# Altium PCB CAN_GPIO_1.0_RW.PcbDoc
Units mil, origin at the board's own origin, x right, y up, seen from the top; angles counter-clockwise.
Board outline 2000 x 3000 mil, 4 copper layers (Top Layer, Vcc, GND, Bottom Layer), stack 23.756 mil thick; 141 components, 72 nets, 323 pads, 43 vias.
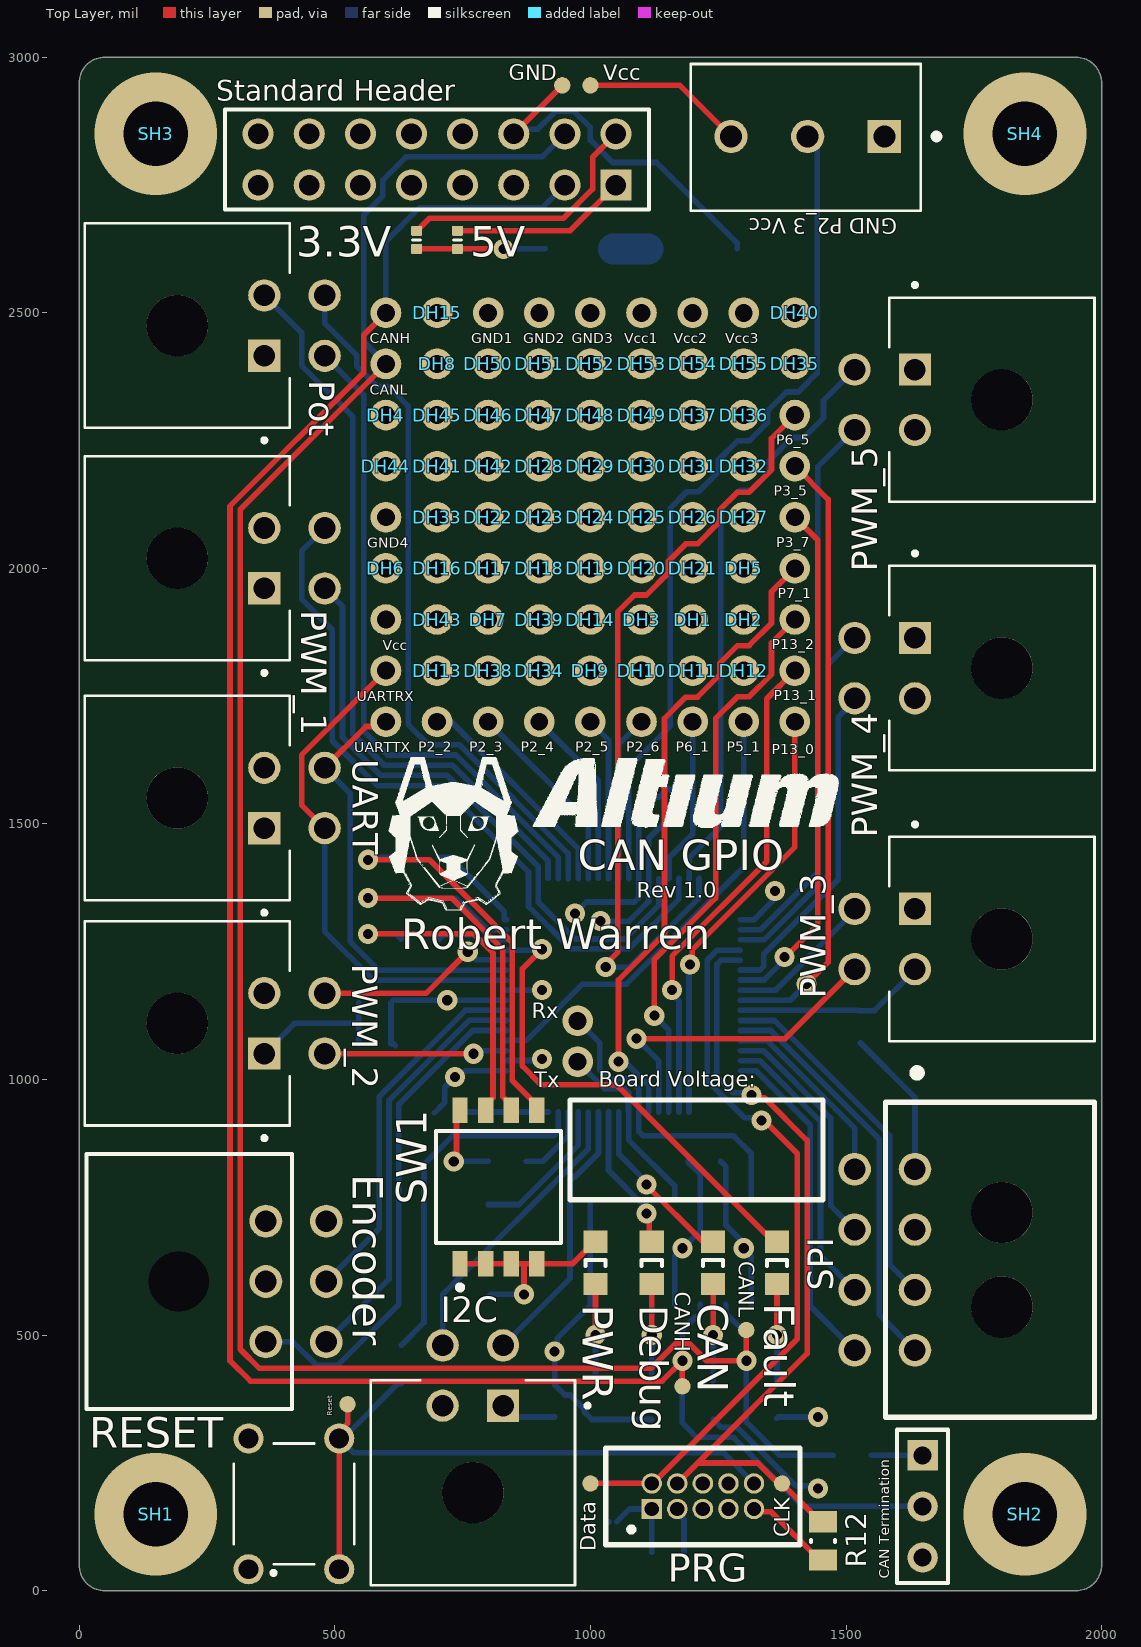
[diagram p0: Top Layer view]
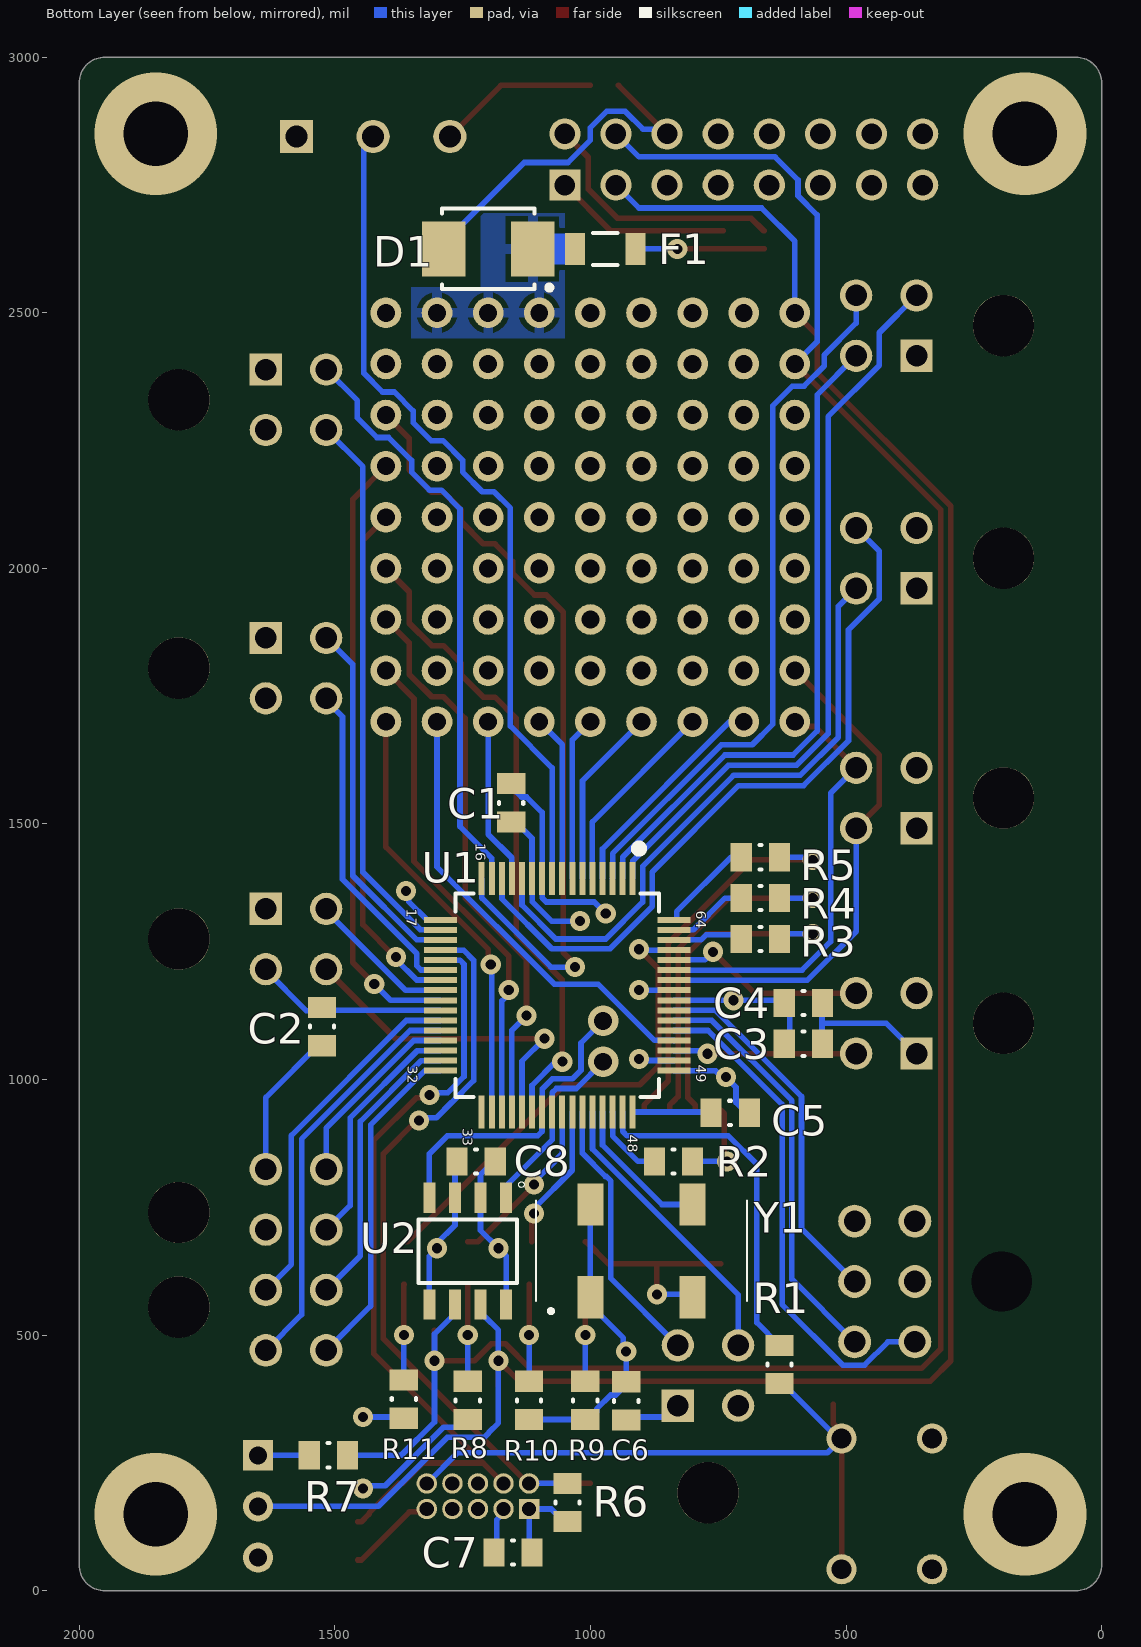
[diagram p1: Bottom Layer view, seen from below]
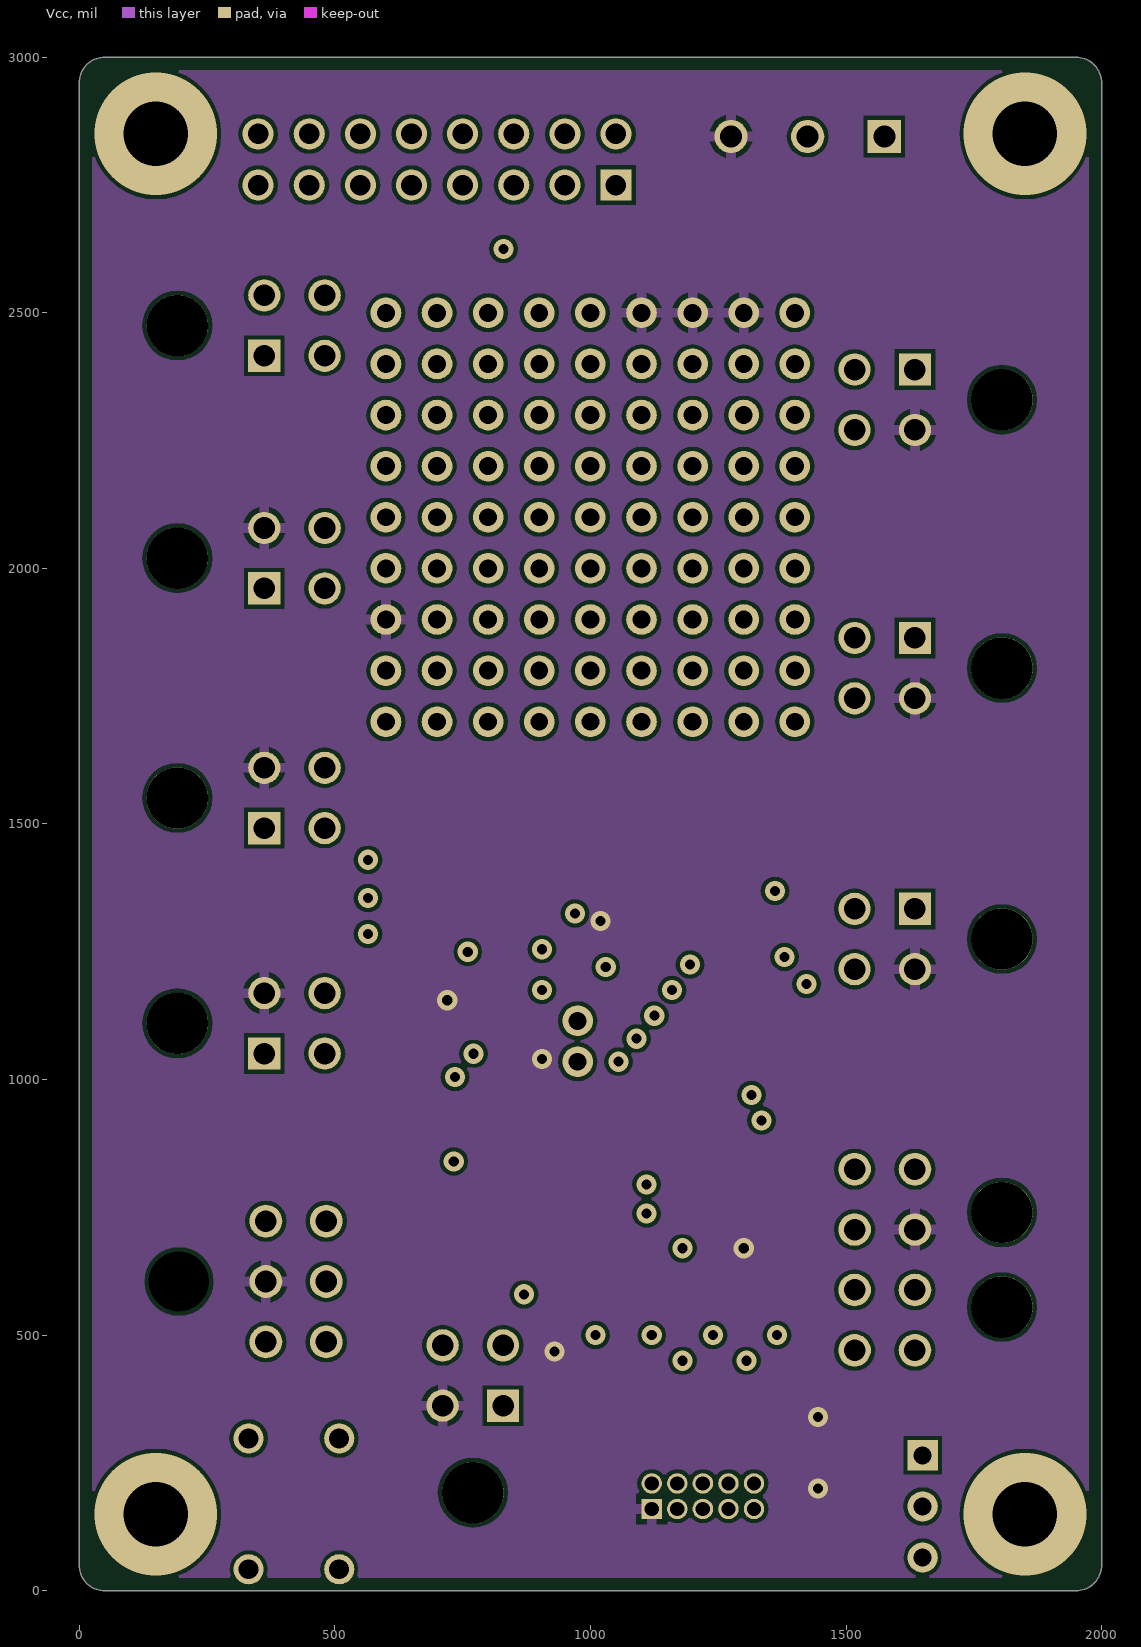
[diagram p2: Vcc]
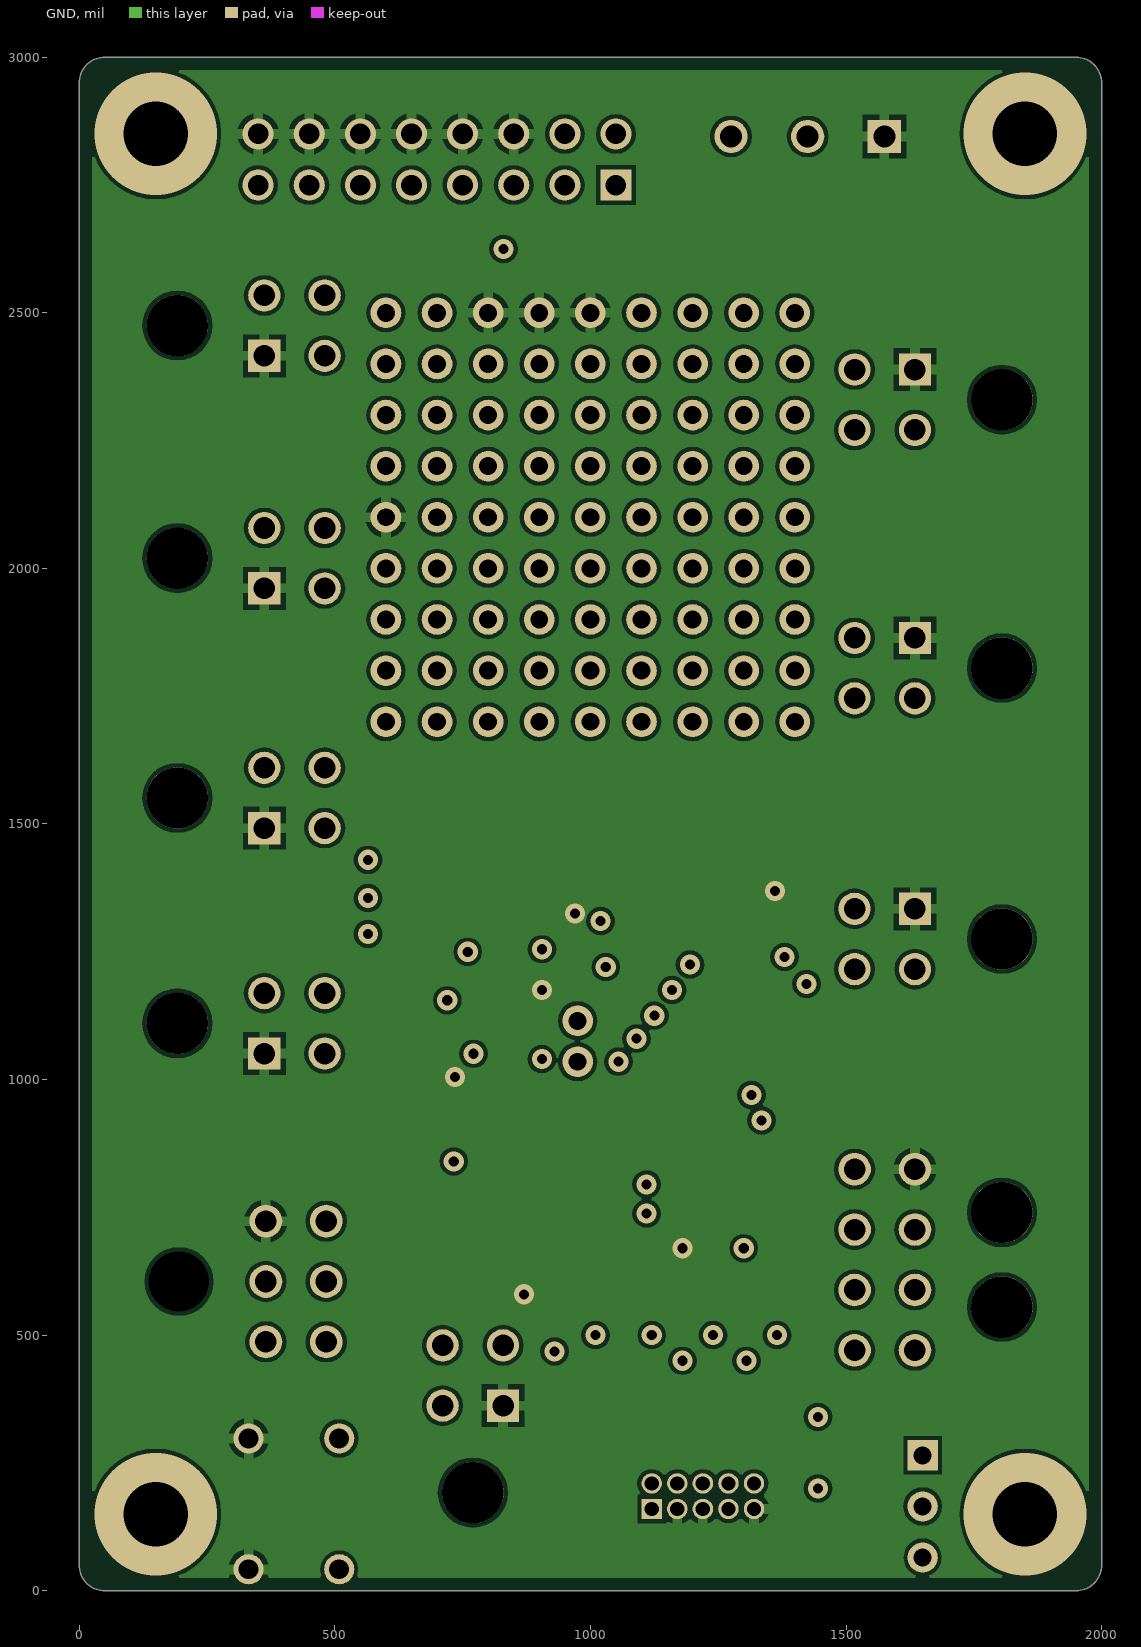
[diagram p3: GND]
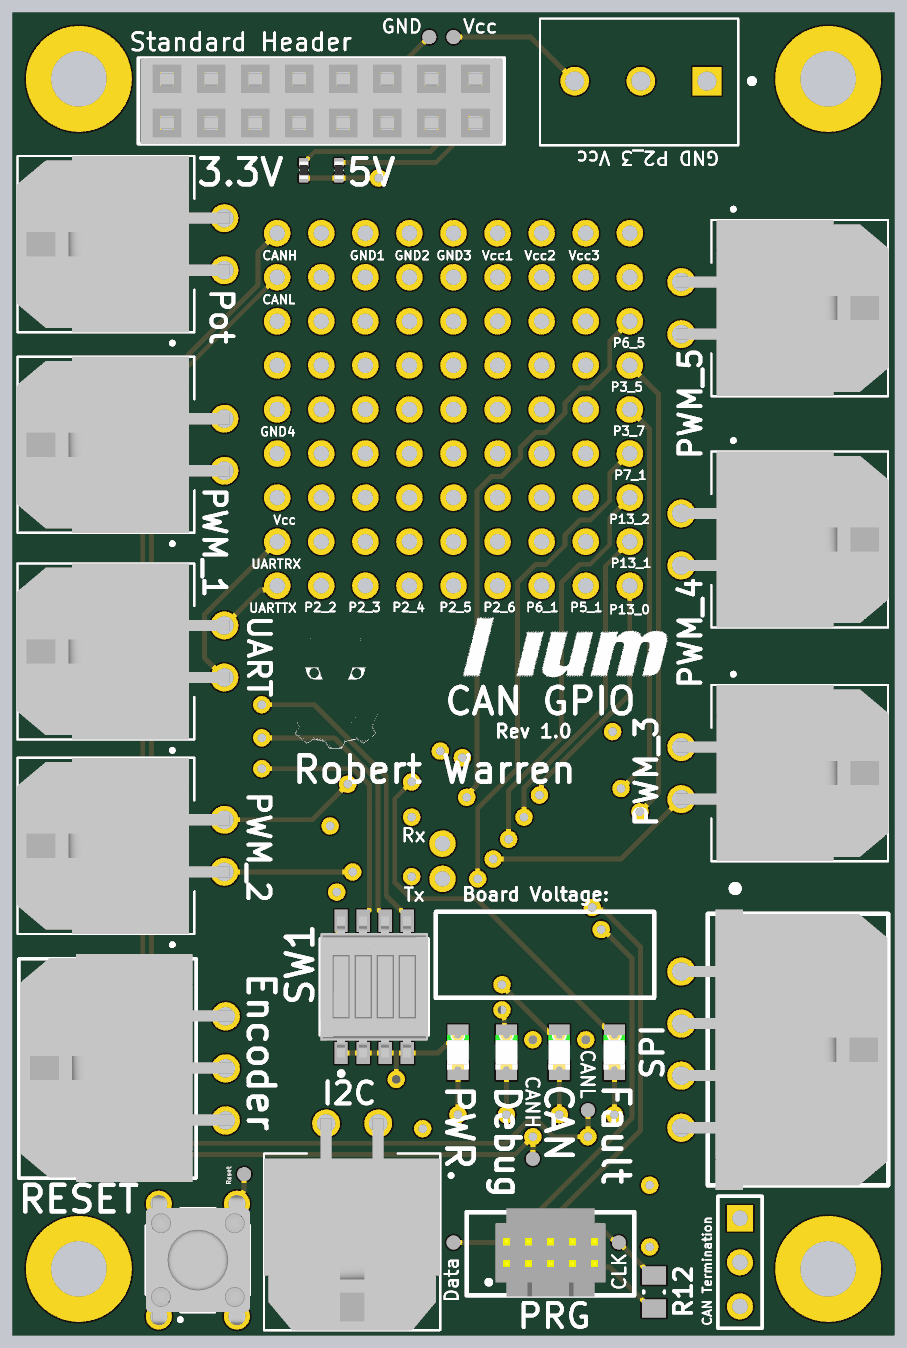
[diagram p4: 3D render of the assembled board from above, using the file's embedded part models]

## Layer stack, top to bottom
Top Solder: solder mask 0.4, Solder Resist, Dk 3.5
Top Layer: signal copper 1.4
Dielectric 2: prepreg 2.8, PP-006, Dk 4.1
Vcc: signal copper 1.378
Dielectric 1: dielectric 12.6, FR-4, Dk 4.8
GND: signal copper 1.378
Dielectric 3: prepreg 2.8, PP-006, Dk 4.1
Bottom Layer: signal copper 1.4
Bottom Solder: solder mask 0.4, Solder Resist, Dk 3.5

## Board outline
50,0 1950,0 ccw(c1950,50) 2000,50 2000,2950 ccw(c1950,2950) 1950,3000 50,3000 ccw(c50,2950) 0,2950 0,50 ccw(c50,50)

## Design rules (kind name [scope] priority, off if disabled: settings)
BoardOutlineClearance [All] p1: gap=7.87 ignorepadtopadclearanceinfootprint=FALSE except(15.75: Arc-SplitBarrior Arc-SplitContinuation Track-SplitBarrior Track-SplitContinuation SMDPad-SplitBarrior SMDPad-SplitContinuation THPad-SplitBarrior THPad-SplitContinuation Via-SplitBarrior Via-SplitContinuation Fill-SplitBarrior Fill-SplitContinuation Poly-SplitBarrior Poly-SplitContinuation Region-SplitBarrior Region-SplitContinuation Text-SplitBarrior Text-SplitContinuation)
Clearance "Clearance Bottom Layer" [OnLayer('Bottom Layer')] p1: gap=8 ignorepadtopadclearanceinfootprint=TRUE except(10: Arc-Text Track-Text SMDPad-Text THPad-Text Via-Text Fill-Text Poly-Text Region-Text Text-Text)
Clearance "Clearance Top Layer" [OnLayer('Top Layer')] p2: gap=8 ignorepadtopadclearanceinfootprint=TRUE except(10: Arc-Text Track-Text SMDPad-Text THPad-Text Via-Text Fill-Text Poly-Text Region-Text Text-Text)
Clearance [All] p3: gap=7.87 ignorepadtopadclearanceinfootprint=FALSE except(3.5: Arc-Arc Arc-Track Arc-SMDPad Track-Track Track-SMDPad SMDPad-SMDPad; 5: Arc-Via Track-Via SMDPad-Via THPad-Via Via-Via; 10: Arc-Text Track-Text SMDPad-Text THPad-Text Via-Text Fill-Text Poly-Text Region-Text Text-Text)
HoleSize [All] p1: absolutevalues=TRUE maxlimit=248.03 minlimit=7.87 maxpercent=80.000 minpercent=20.000
MinimumAnnularRing [All] p1: minimumring=3
MinimumSolderMaskSliver [All] p1: minsoldermaskwidth=3.94
PolygonConnect PolygonConnect_1 [All] p1: thpad.connectstyle=Relief thpad.reliefconductorwidth=20 thpad.reliefentries=4 thpad.polygonreliefangle="90 Angle" thpad.airgapwidth=10 smdpad.connectstyle=Relief smdpad.reliefconductorwidth=20 smdpad.reliefentries=4 smdpad.polygonreliefangle="90 Angle" smdpad.airgapwidth=10 via.connectstyle=Direct via.reliefconductorwidth=20 via.reliefentries=4 via.polygonreliefangle="90 Angle" via.airgapwidth=10
RoutingCorners [All] p1: cornerstyle=Round minsetback=100 maxsetback=100
RoutingVias [All] p1: holewidth=19.68 width=39.37 viastyle="Through Hole" minholewidth=7.87 minwidth=17.72 maxholewidth=39.37 maxwidth=78.74
SilkToSilkClearance [All] p1: silktosilkclearance=3.94
SilkToSolderMaskClearance [IsPad] p1: minsilkscreentomaskgap=3.94 clearancetoexposedcopper=TRUE
SolderMaskExpansion [All] p1: expansion=4 istentingtop=FALSE
Width [All] p1: maxlimit=100 minlimit=3.5 preferedwidth=15
25 further rules are at their usual default settings.

## Classes and differential pairs
component class LEDs: CAN Debug Fault PWR R8 R9 R10 R11
component class PSoC: 11 C1 C2 C3 C4 C5 C6 GND R1 R2 R3 R4 R5 RESET "Reset " SH1 SH2 SH3 SH4 SW1 U1 "Vcc  " Y1
component class Connectors: 3.3V 5V 20 C7 "CANH " "CANL " CLK D1 Data DH1 DH2 DH3 DH4 DH5 DH6 DH7 DH8 DH9 DH10 DH11 DH12 DH13 DH14 DH15 DH16 DH17 DH18 DH19 DH20 DH21 DH22 DH23 DH24 DH25 DH26 DH27 DH28 DH29 DH30 DH31 DH32 DH33 DH34 DH35 DH36 DH37 DH38 DH39 DH40 DH41 DH42 DH43 DH44 DH45 DH46 DH47 DH48 DH49 DH50 DH51 DH52 DH53 DH54 DH55 Encoder F1 GND1 GND2 GND3 GND4 "GND P2_3 Vcc" I2C P2_2 P2_3 P2_4 P2_5 P2_6 P3_5 P3_7 P5_1 P6_1 P6_5 P7_1 P13_0 P13_1 P13_2 Pot PRG PWM_1 PWM_2 PWM_3 PWM_4 PWM_5 R6 R12 SPI "Standard Header" UART UARTRX UARTTX Vcc Vcc1 Vcc2 Vcc3
component class CAN: C8 "CAN Termination" CANH CANL R7 Rx Tx U2

## Components (designator, comment, footprint, x,y, rotation, side; value= is the part's Value field where it differs from the comment)
3.3V "JUMPER" RESC0402(1005)_L 660,2642.72 r270 top value=0
5V "JUMPER" RESC0402(1005)_L 740,2642.72 r270 top value=0
C1 "10 μF" "Cap 0805" 1155,1541.5 r270 bottom
C2 "10 μF" "Cap 0805" 1525,1103.5 r270 bottom
C3 "0.1 μF" "Cap 0805" 583.5,1070 r0 bottom
C4 "0.1 μF" "Cap 0805" 583.5,1150 r180 bottom
C5 "1 μF" "Cap 0805" 726.5,935 r0 bottom
C6 "0.1 μF" "Cap 0805" 930,371.5 r90 bottom
C7 "0.1 μF" "Cap 0805" 1151.5,75 r180 bottom
C8 "0.1 μF" "Cap 0805" 1223.5,840 r180 bottom
CAN "LED" 0805_A 1240,641.34 r270 top
"CAN Termination" "Header 3" HDR1X3 1650,265 r270 top
CANH "Test Point" "Test Point Through-hole" 625,2480 r90 top
CANH "Test Point" "Test Point pad" 1200,415 r180 top
CANL "Test Point" "Test Point Through-hole" 625,2380 r90 top
CANL "Test Point" "Test Point pad" 1325,525 r180 top
CLK "Test Point" "Test Point pad" 1355,195 r0 top
D1 "1SMB5917BT3G" ONSC-SMB-2-403A-03_H_V 1200,2625 r0 bottom
Data "Test Point" "Test Point pad" 980,195 r0 top
Debug "LED" 0805_A 1120,641.34 r270 top
DH1 "Test Point" "Test Point Through-hole" 1180,1875 r0 top
DH2 "Test Point" "Test Point Through-hole" 1325,1880 r90 top
DH3 "Test Point" "Test Point Through-hole" 1125,1880 r90 top
DH4 "Test Point" "Test Point Through-hole" 625,2280 r90 top
DH5 "Test Point" "Test Point Through-hole" 1325,1980 r90 top
DH6 "Test Point" "Test Point Through-hole" 620,2025 r180 top
DH7 "Test Point" "Test Point Through-hole" 820,1925 r180 top
DH8 "Test Point" "Test Point Through-hole" 725,2380 r90 top
DH9 "Test Point" "Test Point Through-hole" 1025,1780 r90 top
DH10 "Test Point" "Test Point Through-hole" 1125,1780 r90 top
DH11 "Test Point" "Test Point Through-hole" 1225,1780 r90 top
DH12 "Test Point" "Test Point Through-hole" 1325,1780 r90 top
DH13 "Test Point" "Test Point Through-hole" 725,1780 r90 top
DH14 "Test Point" "Test Point Through-hole" 1025,1880 r90 top
DH15 "Test Point" "Test Point Through-hole" 680,2475 r0 top
DH16 "Test Point" "Test Point Through-hole" 725,1980 r90 top
DH17 "Test Point" "Test Point Through-hole" 825,1980 r90 top
DH18 "Test Point" "Test Point Through-hole" 925,1980 r90 top
DH19 "Test Point" "Test Point Through-hole" 1025,1980 r90 top
DH20 "Test Point" "Test Point Through-hole" 1125,1980 r90 top
DH21 "Test Point" "Test Point Through-hole" 1225,1980 r90 top
DH22 "Test Point" "Test Point Through-hole" 825,2080 r90 top
DH23 "Test Point" "Test Point Through-hole" 925,2080 r90 top
DH24 "Test Point" "Test Point Through-hole" 1025,2080 r90 top
DH25 "Test Point" "Test Point Through-hole" 1125,2080 r90 top
DH26 "Test Point" "Test Point Through-hole" 1225,2080 r90 top
DH27 "Test Point" "Test Point Through-hole" 1325,2080 r90 top
DH28 "Test Point" "Test Point Through-hole" 925,2180 r90 top
DH29 "Test Point" "Test Point Through-hole" 1025,2180 r90 top
DH30 "Test Point" "Test Point Through-hole" 1125,2180 r90 top
DH31 "Test Point" "Test Point Through-hole" 1225,2180 r90 top
DH32 "Test Point" "Test Point Through-hole" 1325,2180 r90 top
DH33 "Test Point" "Test Point Through-hole" 725,2080 r90 top
DH34 "Test Point" "Test Point Through-hole" 925,1780 r90 top
DH35 "Test Point" "Test Point Through-hole" 1425,2380 r90 top
DH36 "Test Point" "Test Point Through-hole" 1325,2280 r90 top
DH37 "Test Point" "Test Point Through-hole" 1225,2280 r90 top
DH38 "Test Point" "Test Point Through-hole" 825,1780 r90 top
DH39 "Test Point" "Test Point Through-hole" 925,1880 r90 top
DH40 "Test Point" "Test Point Through-hole" 1425,2480 r90 top
DH41 "Test Point" "Test Point Through-hole" 725,2180 r90 top
DH42 "Test Point" "Test Point Through-hole" 825,2180 r90 top
DH43 "Test Point" "Test Point Through-hole" 725,1880 r90 top
DH44 "Test Point" "Test Point Through-hole" 625,2180 r90 top
DH45 "Test Point" "Test Point Through-hole" 725,2280 r90 top
DH46 "Test Point" "Test Point Through-hole" 825,2280 r90 top
DH47 "Test Point" "Test Point Through-hole" 925,2280 r90 top
DH48 "Test Point" "Test Point Through-hole" 1025,2280 r90 top
DH49 "Test Point" "Test Point Through-hole" 1125,2280 r90 top
DH50 "Test Point" "Test Point Through-hole" 825,2380 r90 top
DH51 "Test Point" "Test Point Through-hole" 925,2380 r90 top
DH52 "Test Point" "Test Point Through-hole" 1025,2380 r90 top
DH53 "Test Point" "Test Point Through-hole" 1125,2380 r90 top
DH54 "Test Point" "Test Point Through-hole" 1225,2380 r90 top
DH55 "Test Point" "Test Point Through-hole" 1325,2380 r90 top
Encoder "Molex Micro" "MICROFIT R/A 6 PIN" -105,864 r270 top
F1 "MF-NSMF150-2" BOUR-MF-NSMF150-2_V 970.94,2625 r0 bottom
Fault "LED" 0805_A 1365,641.34 r270 top
GND "Test Point" "Test Point pad" 930,2965 r270 top
GND1 "Test Point" "Test Point Through-hole" 780,2475 r0 top
GND2 "Test Point" "Test Point Through-hole" 880,2475 r0 top
GND3 "Test Point" "Test Point Through-hole" 980,2475 r0 top
GND4 "Test Point" "Test Point Through-hole" 625,2080 r90 top
"GND P2_3 Vcc" "1985836" PHOENIX_1985836 1575,2845 r180 top
I2C "Molex Micro" "MICROFIT R/A 4 PIN" 568,6.93 r0 top
P2_2 "Test Point" "Test Point Through-hole" 725,1680 r90 top
P2_3 "Test Point" "Test Point Through-hole" 825,1680 r90 top
P2_4 "Test Point" "Test Point Through-hole" 925,1680 r90 top
P2_5 "Test Point" "Test Point Through-hole" 980,1675 r0 top
P2_6 "Test Point" "Test Point Through-hole" 1080,1675 r0 top
P3_5 "Test Point" "Test Point Through-hole" 1425,2180 r90 top
P3_7 "Test Point" "Test Point Through-hole" 1425,2080 r90 top
P5_1 "Test Point" "Test Point Through-hole" 1325,1680 r90 top
P6_1 "Test Point" "Test Point Through-hole" 1225,1680 r90 top
P6_5 "Test Point" "Test Point Through-hole" 1425,2280 r90 top
P7_1 "Test Point" "Test Point Through-hole" 1375,2020 r270 top
P13_0 "Test Point" "Test Point Through-hole" 1375,1720 r270 top
P13_1 "Test Point" "Test Point Through-hole" 1375,1820 r270 top
P13_2 "Test Point" "Test Point Through-hole" 1375,1920 r270 top
Pot "Molex Micro" "MICROFIT R/A 4 PIN" 6.93,2677 r270 top
PRG "Programming Header" programming3D 1024.72,68.23 r0 top
PWM_1 "Molex Micro" "MICROFIT R/A 4 PIN" 6.93,2222 r270 top
PWM_2 "Molex Micro" "MICROFIT R/A 4 PIN" 6.93,1312 r270 top
PWM_3 "Molex Micro" "MICROFIT R/A 4 PIN" 1990,1073 r90 top
PWM_4 "Molex Micro" "MICROFIT R/A 4 PIN" 1990,1603 r90 top
PWM_5 "Molex Micro" "MICROFIT R/A 4 PIN" 1990,2128 r90 top
PWR "LED" 0805_A 1010,641.34 r270 top
R1 "Resistor 0805" RESC0805(2012)_N 630,442.6 r90 bottom value=120R
R2 "Resistor 0805" RESC0805(2012)_N 837.4,840 r0 bottom value=120R
R3 "Resistor 0805" RESC0805(2012)_N 667.4,1275 r0 bottom value=120R
R4 "Resistor 0805" RESC0805(2012)_N 667.4,1355 r0 bottom value=120R
R5 "Resistor 0805" RESC0805(2012)_N 667.4,1435 r0 bottom value=120R
R6 "47 kOhm" RESC0805(2012)_N 1045,172.6 r270 bottom
R7 "120R" RESC0805(2012)_N 1512.6,265 r0 bottom
R8 "200 Ohm" RESC0805(2012)_N 1240,372.4 r90 bottom value=120R
R9 "300 Ohm" RESC0805(2012)_N 1010,372.4 r90 bottom value=120R
R10 "300 Ohm" RESC0805(2012)_N 1120,372.4 r90 bottom value=120R
R11 "300 Ohm" RESC0805(2012)_N 1365,375 r90 bottom value=120R
R12 "47 kOhm" RESC0805(2012)_N 1455,97.6 r90 top
Reset "Test Point" "Test Point pad" 545,380 r180 top
RESET "1825910-7" "Switch 6mm 24V (NO)" 420,170 r90 top
Rx "Test Point" "Test Point Through-hole" 995,1140 r180 top
SH1 "Screw Hole" "Screw Hole" 150,150 r0 top locked
SH2 "Screw Hole" "Screw Hole" 1850,150 r0 top locked
SH3 "Screw Hole" "Screw Hole" 150,2850 r0 top locked
SH4 "Screw Hole" "Screw Hole" 1850,2850 r0 top locked
SPI "Molex micro-fit 8-pin" "MICROFIT R/A 8 PIN" 1877,397.52 r90 top
"Standard Header" "Stacking Header" SMTC-SSQ-108-02-X-D 1050,2750 r180 top
SW1 "TDA04H0SB1" CKCP-TDA04H0SB1R_V 820,790 r90 top
Tx "Test Point" "Test Point Through-hole" 995,1060 r180 top
U1 "CY8C4248AZI-L485" TQFP50P1200X1200X160-64N 1065,1165 r270 bottom
U2 "MCP2562-E/SN" SOIC127P600X175-8N 1240,664.45 r270 bottom
UART "Molex Micro" "MICROFIT R/A 4 PIN" 6.93,1752.94 r270 top
UARTRX "Test Point" "Test Point Through-hole" 580,1775 r0 top
UARTTX "Test Point" "Test Point Through-hole" 625,1680 r90 top
Vcc "Test Point" "Test Point Through-hole" 625,1880 r90 top
Vcc "Test Point" "Test Point pad" 1015,2925 r90 top
Vcc1 "Test Point" "Test Point Through-hole" 1125,2480 r90 top
Vcc2 "Test Point" "Test Point Through-hole" 1225,2480 r90 top
Vcc3 "Test Point" "Test Point Through-hole" 1325,2480 r90 top
Y1 "SG-636PCW_50.0000MC3__ROHS" SG-636_3D 900,665 r180 bottom

## Footprints (in the part's own frame and the unit in brackets; to place one, negate y for a bottom-side part, rotate by r counter-clockwise, add the part's x,y. Pads: shape width x height; smd on the part's side, far side on the other; paste and mask are expansions set on the pad)
0805_A [mm] "Chip LED, 2-Leads, Body 2.0x1.3mm, IPC Medium Density"
  rect 1.1x1.2 smd: 1(-1.05,0) 2(1.05,0)
  silkscreen extent -0.15,-0.5 0.15,0.5, body extent -1,-0.62 1,0.63, height 0.68
BOUR-MF-NSMF150-2_V [mm] "SMD, 2-Leads, Body 3.2x1.6mm"
  rect 1x1.6 smd: 1(-1.5,0) 2(1.5,0)
  silkscreen extent -0.6,-0.8 0.6,0.8, body extent -1.6,-0.8 1.6,0.8, height 0.55
"Cap 0805" [mm]
  rect 1.05x1.4 smd: 1(-0.95,0) 2(0.95,0)
  silkscreen extent -0.05,-0.6 0.05,0.6, body extent -1.1,-0.67 1.1,0.68, height 0.7
CKCP-TDA04H0SB1R_V [mm] "SMD, 8-Leads, Body 6.21x6.2mm, Pitch 1.27mm"
  rect 1.27x0.76 smd: 1(-3.81,1.905) 2(-3.81,0.635) 3(-3.81,-0.635) 4(-3.81,-1.905) 5(3.81,-1.905) 6(3.81,-0.635) 7(3.81,0.635) 8(3.81,1.905)
  silkscreen extent -5.12,-3.11 2.78,3.11, body extent -4.06,-3.1 4.06,3.11, height 2.3
HDR1X3 [mm] "Connector; Header; 3 Position"
  rect 1.5x1.5 hole 0.9: 1(0,0)
  round 1.5 hole 0.9: 2(2.54,0) 3(5.08,0)
  silkscreen extent -1.27,-1.27 6.35,1.27
"MICROFIT R/A 4 PIN" [mm]
  rect 1.605x1.605 hole 1.07: 1(6.631,9.019)
  round 1.605 hole 1.07: 2(3.631,9.019) 3(6.631,12.019) 4(3.631,12.019)
  round 3.05 hole 3.05 unplated: None(5.131,4.699)
  silkscreen extent 0.06,0.1 10.93,10.29, body extent 0.06,0.07 10.21,12.31, height 8.78
"MICROFIT R/A 6 PIN" [mm]
  round 1.63 hole 1.07: 1(3.579,11.94) 2(6.579,11.94) 3(9.579,11.94) 4(9.579,14.94) 5(6.579,14.94) 6(3.579,14.94)
  round 0 hole 3 unplated: 7(6.579,7.62)
  silkscreen extent 0.25,3.02 12.9,13.23, body extent -0.02,3.13 13.13,15.37, height 8.28
"MICROFIT R/A 8 PIN" [mm]
  round 1.62 hole 1.07: 1(10.85,6.149) 2(7.85,6.149) 3(4.85,6.149) 4(1.85,6.149) 5(10.85,9.149) 6(7.85,9.149) 7(4.85,9.149) 8(1.85,9.149)
  round 3.05 hole 3.05 unplated: 9(4,1.829) 10(8.7,1.829)
  silkscreen extent -1.48,-2.77 15.82,7.62, body extent -1.73,-2.73 14.43,9.51, height 8.74
ONSC-SMB-2-403A-03_H_V [mil] "Molded, 2-Leads, Body 4.6x3.95mm"
  rect 85x107.99 smd: 1(-87.01,0) 2(87.01,0)
  silkscreen extent -125,-79 91,81, body extent -91,-78 91,78, height 95
PHOENIX_1985836 [mm]
  rect 1.65x1.65 hole 1.1: 1(0,0)
  round 1.65 hole 1.1: 2(3.81,0) 3(7.62,0)
  silkscreen extent -2.73,-3.6 9.62,3.7
programming3D [mil]
  rect 40x40 hole 28 mask+3: 1(95.28,91.77)
  round 40 hole 28 mask+3: 2(95.28,141.77) 3(145.28,91.77) 4(145.28,141.77) 5(195.28,91.77) 6(195.28,141.77) 7(245.28,91.77) 8(245.28,141.77) 9(295.28,91.77) 10(295.28,141.77)
  silkscreen extent 5,22 385,211, body extent 70,19 320,219, height 226
RESC0402(1005)_L [mm] "Chip Resistor, Body 1.0x0.5mm, IPC High Density"
  rrect25% 0.5x0.55 smd: 1(-0.45,0) 2(0.45,0)
  silkscreen extent 0,-0.2 0,0.2, body extent -0.5,-0.25 0.5,0.25, height 0.3
RESC0805(2012)_N [mm] "Chip Resistor, Body 2.0x1.3mm, IPC Medium Density"
  rect 1.05x1.4 smd: 1(-0.95,0) 2(0.95,0)
  silkscreen extent -0.05,-0.6 0.05,0.6, body extent -1.1,-0.67 1.1,0.68, height 0.7
"Screw Hole" [mil]
SG-636_3D [mm]
  rect 1.3x2.1 smd: 1(-2.54,-2.3) 2(2.54,-2.3) 3(2.54,2.3) 4(-2.54,2.3)
  silkscreen extent -5.25,-3.1 5.25,2.5, body extent -5.25,-3.22 5.25,3.22, height 2.8
SMTC-SSQ-108-02-X-D [mm] "SQ Post Socket, 2x8 Pins, Vertical, 2.54mm Pitch, Female"
  rect 1.55x1.55 hole 1.02: 1(0,0)
  round 1.55 hole 1.02: 2(0,-2.54) 3(2.54,0) 4(2.54,-2.54) 5(5.08,0) 6(5.08,-2.54) 7(7.62,0) 8(7.62,-2.54) 9(10.16,0) 10(10.16,-2.54) 11(12.7,0) 12(12.7,-2.54) 13(15.24,0) 14(15.24,-2.54) 15(17.78,0) 16(17.78,-2.54)
  silkscreen extent -1.65,-3.74 19.43,1.2, body extent -1.52,-3.75 19.3,1.21, height 8.51
SOIC127P600X175-8N [mm]
  rect 1.5x0.6 smd: 1(-2.65,1.905) 2(-2.65,0.635) 3(-2.65,-0.635) 4(-2.65,-1.905) 5(2.65,-1.905) 6(2.65,-0.635) 7(2.65,0.635) 8(2.65,1.905)
  silkscreen extent -3.44,-2.45 1.58,2.81, body extent -3.12,-2.45 3.13,2.45, height 1.76
"Switch 6mm 24V (NO)" [mm]
  round 1.498 hole 0.99: 1a(-3.25,2.25) 1b(3.25,2.25) 2a(-3.25,-2.25) 2b(3.25,-2.25)
  silkscreen extent -3.53,-3 3,3, body extent -3.9,-2.99 3.9,3, height 5.01
"Test Point pad" [mil]
  round 32 smd: 1(20,15)
"Test Point Through-hole" [mil]
  round 60 hole 35: 1(20,25)
TQFP50P1200X1200X160-64N [mm]
  rect 1.65x0.3 smd mask+0: 1(-5.801,3.75) 2(-5.801,3.25) 3(-5.801,2.75) 4(-5.801,2.25) 5(-5.801,1.75) 6(-5.801,1.25) 7(-5.801,0.75) 8(-5.801,0.25) 9(-5.801,-0.25) 10(-5.801,-0.75) 11(-5.801,-1.25) 12(-5.801,-1.75) 13(-5.801,-2.25) 14(-5.801,-2.75) 15(-5.801,-3.25) 16(-5.801,-3.75) 33(5.801,-3.75) 34(5.801,-3.25) 35(5.801,-2.75) 36(5.801,-2.25) 37(5.801,-1.75) 38(5.801,-1.25) 39(5.801,-0.75) 40(5.801,-0.25) 41(5.801,0.25) 42(5.801,0.75) 43(5.801,1.25) 44(5.801,1.75) 45(5.801,2.25) 46(5.801,2.75) 47(5.801,3.25) 48(5.801,3.75)
  rect 0.3x1.65 smd mask+0: 17(-3.75,-5.801) 18(-3.25,-5.801) 19(-2.75,-5.801) 20(-2.25,-5.801) 21(-1.75,-5.801) 22(-1.25,-5.801) 23(-0.75,-5.801) 24(-0.25,-5.801) 25(0.25,-5.801) 26(0.75,-5.801) 27(1.25,-5.801) 28(1.75,-5.801) 29(2.25,-5.801) 30(2.75,-5.801) 31(3.25,-5.801) 32(3.75,-5.801) 49(3.75,5.801) 50(3.25,5.801) 51(2.75,5.801) 52(2.25,5.801) 53(1.75,5.801) 54(1.25,5.801) 55(0.75,5.801) 56(0.25,5.801) 57(-0.25,5.801) 58(-0.75,5.801) 59(-1.25,5.801) 60(-1.75,5.801) 61(-2.25,5.801) 62(-2.75,5.801) 63(-3.25,5.801) 64(-3.75,5.801)
  silkscreen extent -7.49,-5.05 5.05,5.05, body extent -5.12,-5.12 5.12,5.12, height 1.6

## Part data
3.3V 5V: library part CMP-009-00062-1, "Jumper 0402 (1005 Metric)", Case/Package=0402, Mounting Technology=SMT, Pins=2
C1 C2 C3 C4 C5 C6 C7 C8: library part "Capacitor 0805", "Standard Capacitor", Case Size/Dimension=0805, Mounting Technology=SurfaceMount, Package Reference=0805
  C1 C2: Capacitance="10 μF"
  C3 C4 C6 C7 C8: Capacitance="0.1 μF"
  C5: Capacitance="1 μF"
CAN: "Standard 0805 LED", Color=Blue, Manufacturer="Wuerth Elektronik", PartNumber=150080SS75000, PackageReference=0805_A
"CAN Termination": "Header, 3-Pin", LatestRevisionDate=17-Jul-2002, LatestRevisionNote="Re-released for DXP Platform.", Publisher="Altium Limited"
D1: library part "Zener Diode 5.1V", "3 W Zener Voltage Regulator, 2-Pin SMB, Pb-Free, Tape and Reel", Manufacturer="On Semiconductor", ComponentLink1Description="Manufacturer URL", ComponentLink1URL=http://www.onsemi.com/, ComponentLink2Description=Datasheet, ComponentLink2URL=http://www.onsemi.com/pub_link/Collateral/1SMB5913BT3-D.PDF, ComponentLink3Description="Package Specification", ComponentLink3URL=http://www.onsemi.com/pub_link/Collateral/1SMB5913BT3-D.PDF, DatasheetVersion="Rev. 8", Mounting Technology="Surface Mount", PackageDescription="2-Pin Small Molded Package, J-Bend Lead, Body 4.33 x 3.625 mm", PackageReference=SMB-2-403A-03_H, PackageVersion="Rev. H, 05/2011", Packing="Tape and Reel", PartNumber=1SMB5917BT3G, RoHS=Pb-Free, VZ Typ (V)=4.7
Debug: "Standard 0805 LED", Color=Green, PackageReference=0805_A
Encoder: library part "Molex micro-fit 6-pin (dual row schematic)", "Molex micro-fit 3.0 dual row connector. P/N 0430450627"
F1: library part CMP-2000-06693-1, "PTC Resettable Fuse, 6 V, 100 A, -40 to 85 degC, 2-Pin SMD, RoHS, Tape and Reel", Current Rating=100A, Hold Current=1.5A, Manufacturer=Bourns, Maximum Voltage=6VDC, Maximum Voltage DC=6V, Operating Temperature Range=-40Cto+85C, Package / Case=1206(3216metric), Package Description="2-Pin Surface Mount Device, Body 3.2 x 1.6 mm", Resistance=130mOhms, Trip Current=3A, Brand=Bourns, Current Rating (Max)=100A, Current Rating - Max=100A, Datasheet URL=http://www.bourns.com/docs/Product-Datasheets/mfnsmf.pdf, Datasheet Version="Rev. T, 08/2015", Dimensions=3.4mmLx1.8mmWx0.7mmH, Factory Pack Quantity=3000, Manufacturer URL=http://www.bourns.com/, Mounting Style=SMD/SMT, Mounting Technology=SurfaceMount, Package Reference=MF-NSMF150-2, Packaging=Reel, Product Category=ResettableFuses-PPTC, RoHS=Details, Series=MF-NSMF, Termination Style=SMD/SMT, Tradename=Multifuse, Type=PTCResettableFuses
Fault: "Standard 0805 LED", Color="Super Red", Manufacturer="Wuerth Elektronik", PartNumber=150080SS75000, ComponentLink1Description="Manufacturer URL", ComponentLink1URL=http://www.we-online.com, ComponentLink2Description=Datasheet, ComponentLink2URL=http://katalog.we-online.com/led/datasheet/150080SS75000.pdf, PackageReference=0805_A
"GND P2_3 Vcc": "3 Position Wire to Board Terminal Block Horizontal with Board 0.150 _3.81mm_ Through Hole", Package=None, Availability=Unavailable, MF="Phoenix Contact", MP=1985836, Price=None, SnapEDA_Link=https://www.snapeda.com/parts/1985836/Phoenix%20Contact/view-part/2770711/?ref=snap
I2C Pot PWM_1 PWM_2 PWM_3 PWM_4 PWM_5 UART: library part "Molex micro-fit 4-pin (dual row schematic)", "Molex micro-fit 3.0, P/N 0430450427"
PWR: "Standard 0805 LED", Color=Yellow, PackageReference=0805_A
R1 R2 R3 R4 R5: "Generic 0805 Resistor", Case-EIA=0805, Case-Metric=2012, Power="0.125 W", Tolerance="5 %", Technology=SMT
R6 R12: library part "Resistor 0805", "Generic 0805 Resistor", Case-EIA=0805, Technology=SMT
R7 R8 R9 R10 R11: library part "Resistor 0805", "Generic 0805 Resistor", Case-EIA=0805, Case-Metric=2012, Power="0.125 W", Tolerance="5 %", Technology=SMT
RESET: library part "Switch 6mm 24V (NO)", "FSM4JAH=6MM TACT SWITCH, HIGH TEMP", Contact_Current_Rating="50 mA", Package=None, Configuration_Pole-Throw="Single Pole - Single Throw", Digi-Key_Part_Number=450-1804-ND, Digi-Key_Purchase_URL=https://www.digikey.com/product-detail/en/te-connectivity-alcoswitch-switches/1825910-7/450-1804-ND/1731414?utm_source=snapeda&utm_medium=aggregator&utm_campaign=symbol, EU_RoHS_Compliance=Compliant, MF="TE Connectivity", MP=1825910-7, SnapEDA_Link=https://www.snapeda.com/parts/1825910-7/TE%20Connectivity%20ALCOSWITCH%20Switches/view-part/?ref=snap, TE_purchase_URL=https://www.te.com/usa-en/product-1825910-7.html?te_bu=Cor&te_type=disp&te_campaign=seda_glo_cor-seda-global-disp-prtnr-fy19-seda-model-bom-cta_sma-317_1&elqCampaignId=32493
SH1 SH2 SH3 SH4: "Add 4 of these to your design for screw hole mounting"
"Standard Header": "SQ Post Socket, Through-hole, Vertical, -55 to 125 degC, 2.54 mm Pitch, 16-Pin, Female, RoHS", Manufacturer=Samtec, PartNumber=SSQ-108-02-G-D, Temperature Range="-55 to 125 degC", ComponentLink1Description="Manufacturer URL", ComponentLink1URL=http://www.samtec.com, ComponentLink2Description=Datasheet, ComponentLink2URL=http://www.samtec.com/documents/webfiles/pdf/SSQ_TH.PDF, ComponentLink3Description="Package Specification", ComponentLink3URL=http://www.samtec.com/documents/webfiles/cpdf/SSQ-1XX-XX-XXX-X-XX-XXX-XX-X-MKT.pdf, DatasheetVersion=F-214, Mounting Technology=Through-hole, Orientation=Vertical, PackageDescription="Assembly, Socket Strip .025[0.64] SQ Tail", PackageReference=SSQ-108-02-X-D, PackageVersion="BD, 6/1987", Pitch="2.54 mm", RoHS=True
SW1: library part "Dip Switch Array SMD Half-Pitch", "Ultra-Miniature Surface Mount Half-Pitch DIP Switch, 25 mA, 24 V, -40 to 85 degC, 8-Pin SMD, RoHS, Tube", Case\Package=DIP, Contact Current Rating="100 mA", Max Contact Resistance="100 mohm", Max Current Rating="25 mA", Max Operating Temperature="85 degC", Max Voltage Rating (DC)="24 V", Min Operating Temperature="-40 degC", Package Quantity=70, ComponentLink1Description=Datasheet, ComponentLink1URL=http://www.ck-components.com/media/1328/tda.pdf, Contact Finish=Gold, Contact Material=Copper, Contact Plating=Gold, Current Rating="100 mA", DatasheetVersion=02/2016, Height="2.3 mm", Lead Pitch="1.27 mm", Length="6.21 mm", Mount="Surface Mount", Mounting Technology="Surface Mount", PackageDescription="8-Pin Surface Mount Device, Body 6.21 x 6.2 mm, Pitch 1.27 mm", PackageReference=TDA04H0SB1R, Packaging=Rail/Tube, Pins=4, Radiation Hardening=No, REACH SVHC="No SVHC", RoHSCompliant=true, Throw Configuration=SPST, Voltage Rating (DC)="24 V"
U1: library part "PSOC MC", "64 pin psoc", Part_Number=CY8C4248AZI-L485
U2: library part "CAN Tranceiver", "Microchip MCP2562-E/SN, CAN Transceiver 1MBps 1-channel IEC 61000-4-2, 8-Pin SOIC", Package="SO-8 Microchip", Availability=Unavailable, MF=Microchip, MP=MCP2562-E/SN, Price=None, SnapEDA_Link=https://www.snapeda.com/parts/MCP2562-E/SN/Microchip/view-part/?ref=snap
Y1: library part Oscilator, "Standard Clock Oscillators", Arrow Part Number="SG-636PCW 50.0000MC3: ROHS", Manufacturer_Name="Epson Timing", Datasheet Link=http://www.mouser.com/ds/2/137/G-636PCE_en-1003252.pdf, Manufacturer_Part_Number="SG-636PCW 50.0000MC3: ROHS"

## Via types
v1: diameter 39.37, hole 19.68, Top Layer to Bottom Layer, 39 vias
v2: diameter 240, hole 126, Top Layer to Bottom Layer, 4 vias

## Nets (pads, with @x,y where several pads share a name; then routed paths per layer and width w, separated by ;. In a path a pad name is that pad's centre, name@x,y a point inside that pad or via, vN(x,y) a via of type N, cw(c..) or ccw(c..) an arc to the next point about the centre after c; other vN are vias at no path point)
3.3V: 3.3V.1 "Standard Header.2" | length 505
  Top Layer w11: 3.3V.1 660.98,2660.43 685.55,2685 947.24,2685 1004.33,2742.09 1004.33,2804.33 1050,2850
5V: 5V.1 "Standard Header.1" | length 347.1
  Top Layer w11: 5V.1 960.43,2660.43 1050,2750
CANH: "CAN Termination.2" "Standard Header.3" CANH.1 U2.7 | length 4465.9
  Top Layer w11: CANH.1@600,2500 556.5,2456.5 556.5,2383.37 295,2121.87 295,450.01 335.01,410 1140,410 v1(1180,450) CANH.1@1180,400
  Bottom Layer w11: CANH.1@600,2500 600,2640 665,2705 905,2705 950,2750 ; U2.7 1215,542.4 1208.69,536.09 1206.09,536.09 1180,510 v1(1180,450) 1180,328.36 1198.94,309.42 1198.94,308.74 1207.68,300 1280,300 1415,165 1650,165
CANL: "Standard Header.4" CANL.1 R7.1 U2.6 | length 4375.4
  Top Layer w11: CANL.1@600,2400 315,2115 315,472.5 352.48,435.02 1118.09,435.02 1166.25,483.19 1193.75,483.19 1226.93,450 v1(1305,450) CANL.1@1305,510
  Bottom Layer w11: CANL.1@600,2400 556.5,2443.5 556.5,2691.5 594.01,2729.01 594.01,2760 639.01,2805 905,2805 950,2850 ; U2.6 1265,542.4 1305,502.4 v1(1305,450) 1305,330 1370,265 R7.1
CANRX: Rx.1 U1.39 U2.4 | length 613.5
  Bottom Layer w11: Rx.1 1018.5,1071.5 1018.5,1018.37 1035.27,1001.6 1074.52,1001.6 1094.25,981.88 1094.25,936.9 U1.39 1094.81,936.34 1094.81,898.55 1103.36,890 1280,890 1315,855 U2.4
CANTX: Tx.1 U1.40 U2.1 | length 367.9
  Bottom Layer w11: Tx.1 1027.4,982.6 1066.65,982.6 1074.56,974.69 1074.56,936.9 U1.40 1074.84,882.09 1165,791.93 U2.1
Clock: CLK.1 PRG.4 R12.2 U1.21 | length 1559.5
  Top Layer w11: PRG.4 1210,250 ; v1(1315,970) 1320.43,964.57 1340.43,964.57 1424,881 1424,464 1210,250 ; CLK.1@1367.38,210 1327.38,250 1210,250 ; CLK.1 1432.94,152.06 1432.94,150.17 1448.11,135 R12.2
  Bottom Layer w11: U1.21@1293.1,1233.62 1255.31,1233.62 1247.4,1225.71 1247.4,1005.86 1278.81,974.45 1310.55,974.45 v1(1315,970)
D+_P13_0: P13_0.1 U1.34 | length 849.1
  Top Layer w11: v1(1195,1225) 1199.59,1229.59 1199.59,1254.59 1400,1455 P13_0.1
  Bottom Layer w11: U1.34 1192.95,1222.95 v1(1195,1225)
D-_P13_1: P13_1.1 U1.35 | length 968.5
  Top Layer w11: v1(1159.77,1175) 1159.77,1241.64 1345,1426.87 1345,1745 P13_1.1
  Bottom Layer w11: v1(1159.77,1175) 1160,1174.77 1160,1167.32 1173.27,1154.06 U1.35
Data: Data.1 PRG.2 R6.1 U1.20 | length 1503.5
  Top Layer w11: Data.1 PRG.2 1121.93,210 1405,493.07 1405,855 1340,920 v1(1335,920)
  Bottom Layer w11: R6.1 PRG.2 ; U1.20@1293.1,1253.3 1248.12,1253.3 1228.4,1233.58 1228.4,997.99 1270.77,955.62 1271.25,955.62 1301.44,925.43 1329.57,925.43 v1(1335,920)
Dip1: R2.2 U1.46 | length 149.3
  Bottom Layer w11: R2.2 906.87,840 956.45,889.58 956.45,936.34 U1.46
"ENC A": Encoder.3 U1.53 | length 990.7
  Bottom Layer w11: Encoder.3 417.98,486.89 463.56,441.3 506.3,441.3 625,560 625,951.26 769.84,1096.1 836.06,1096.1 U1.53@836.34,1095.82
"ENC B": Encoder.4 U1.54 | length 818.5
  Bottom Layer w11: Encoder.4 606,609.7 606,959.13 762.66,1115.79 836.06,1115.79 U1.54@836.34,1115.51
"ENC Z": Encoder.5 U1.55 | length 724.4
  Bottom Layer w11: Encoder.5 587,708.81 587,967 755.47,1135.47 U1.55
GND: "GND P2_3 Vcc.1" "Standard Header.6" "Standard Header.8" "Standard Header.10" "Standard Header.12" "Standard Header.14" "Standard Header.16" C1.1 C2.2 C3.1 C4.2 C5.1 C6.1 C7.1 C8.2 D1.2 Encoder.1 GND1.1 GND2.1 GND3.1 GND4.1 GND.1 I2C.1 Pot.1 PRG.3 PRG.5 PRG.9 PWM_1.1 PWM_2.1 PWM_3.1 PWM_4.1 PWM_5.1 PWR.1 R12.1 RESET.1a RESET.1b SPI.1 SW1.1 SW1.2 SW1.3 SW1.4 U1.10 U1.17 U1.49 U1.57 U2.2 U2.8 UART.1 Y1.2 | length 3151.1
  Top Layer w11: SW1.1 SW1.2 SW1.3 870,640 ; 850,2850 GND.1 ; v1(870,580) 870,640 ; PWR.1 1008.03,682.68 965.35,640 SW1.4 870,640 ; PRG.9 1325.55,154.45 1353.86,154.45 1448.11,60.2 R12.1
  Bottom Layer w11: PWM_2.1 421.06,1110 547.01,1110 ; C3.1@547.01,1070 547.01,1110 ; C4.2@547.01,1150 547.01,1110 ; C5.1@695,935 715.09,955.09 715.09,985.09 v1(735,1005) 742.68,1005 755.04,1017.36 U1.49 ; Y1.2 805.55,580 v1(870,580) ; I2C.1 851.06,340 C6.1@930,340 ; U1.57 836.78,1175 v1(905,1175) ; 850,2850 859.25,2859.25 897.01,2859.25 931.77,2894.01 968.23,2894.01 1000,2862.24 1000,2837.76 1043.75,2794.01 1129.49,2794.01 1287.01,2636.5 D1.2 ; v1(970,1325) 992.4,1347.4 1086.34,1347.4 1094.25,1355.31 1094.25,1393.1 U1.10 1094.53,1522.75 1124.68,1552.9 1134.91,1552.9 C1.1@1152.01,1570 ; C1.1@1157.05,1566.5 C1.1@1160,1566.5 ; U2.8 1165,655 v1(1180,670) 1215,705 U2.2 1215,814.06 1192.01,837.05 C8.2@1192.01,840 ; PRG.3 1170,152.15 1182.99,139.16 C7.1@1182.99,75 ; U1.17 1319.95,1312.64 1355.54,1348.22 1355.54,1363.61 v1(1360.97,1369.03) ; C2.2@1527.95,1072.01 1634.92,965.04 SPI.1
Laser5V_1: PWM_1.4 U1.14 | length 1426.2
  Bottom Layer w11: PWM_1.4 435,2033.94 435,1940 495,1880 495,1662.87 582.87,1575 710,1575 878.96,1406.04 878.96,1338.57 961.53,1256 1075.55,1256 1172.99,1353.44 1172.99,1393.1 U1.14
Laser5V_2: PWM_2.4 U1.60 | length 396.3
  Top Layer w11: PWM_2.4 679.06,1169.06 v1(760,1250)
  Bottom Layer w11: v1(760,1250) 775.82,1234.18 U1.60@836.34,1234.18
Laser5V_3: PWM_3.4 U1.37 | length 644.7
  Top Layer w11: v1(1090,1080) 1380.87,1080 PWM_3.4
  Bottom Layer w11: v1(1090,1080) 1133.9,1036.09 U1.37
Laser5V_4: PWM_4.4 U1.22 | length 646
  Bottom Layer w11: U1.22@1293.66,1214.49 1331.45,1214.49 1339.36,1222.4 1339.36,1246.29 1485,1391.93 1485,1709.74 1516.81,1741.55 PWM_4.4
Laser5V_5: PWM_5.4 U1.18 | length 1092.9
  Bottom Layer w11: U1.18@1293.66,1293.23 1332.56,1293.23 1445,1405.67 1445,2199.13 PWM_5.4
"LED CAN": CAN.1 U1.41 | length 342.2
  Top Layer w11: v1(1110,795) 1110,792.68 1220,682.68 CAN.1
  Bottom Layer w11: U1.41 1055.16,854.84 1110,800 v1(1110,795)
"LED Debug": Debug.1 U1.42 | length 284.6
  Top Layer w11: v1(1110,737.68) 1115,732.68 Debug.1@1115,682.68
  Bottom Layer w11: U1.42 1035.47,822.6 1110,748.07 v1@1110,740
"LED Fault": Fault.1 U1.61 | length 949
  Top Layer w11: v1(905,1255) 866.81,1216.81 866.81,1026.67 903.48,990 1050.71,990 1358.03,682.68 Fault.1@1360,682.68
  Bottom Layer w11: U1.61 836.9,1253.3 903.3,1253.3 v1(905,1255)
MISO: SPI.4 U1.28 | length 802
  Bottom Layer w11: U1.28 1352.73,1096.1 1565,883.83 1565,540.28 SPI.4
MOSI: SPI.3 U1.27 | length 707.4
  Bottom Layer w11: U1.27@1293.66,1115.51 1360.19,1115.51 1585,890.7 1585,638.39 SPI.3
Net3.3V_2: 3.3V.2 5V.2 F1.1 | length 251.9
  Top Layer w11: 3.3V.2 5V.2 v1(830,2625)
  Bottom Layer w11: v1(830,2625) F1.1
NetC5_2: C5.2 U1.48 | length 160
  Bottom Layer w11: C5.2@757.99,935 759.61,936.62 U1.48
"NetCAN Termination_1": "CAN Termination.1" R7.2 | length 100
  Bottom Layer w11: R7.2 1650,265
NetCAN_2: CAN.2 R8.2 | length 189.4
  Top Layer w11: v1@1240,497.68 CAN.2@1240,597.68
  Bottom Layer w11: R8.2 1240,498.83 v1@1240.25,499.08
  other v1: 1240,500
NetDebug_2: Debug.2 R10.2 | length 192.3
  Top Layer w11: v1@1120,502.68 Debug.2
  Bottom Layer w11: R10.2 v1@1120,504.8
  other v1: 1120,500
NetFault_2: Fault.2 R11.2 | length 188.4
  Top Layer w11: v1(1365,500) 1365,598.07 1364.03,599.03 Fault.2
  Bottom Layer w11: R11.2 v1(1365,500)
NetPWR_2: PWR.2 R9.2 | length 190.2
  Top Layer w11: v1(1010,500) PWR.2
  Bottom Layer w11: R9.2 v1(1010,500)
NetR1_2: R1.2 U1.47 | length 699.9
  Bottom Layer w11: R1.2 674.45,524.45 674.45,834.45 730,890 928.22,890 936.77,898.55 936.77,936.34 U1.47
NetR2_1: R2.1 SW1.8 | length 172.5
  Top Layer w11: v1(732.65,840) 738.07,845.43 738.07,933.07 SW1.8
  Bottom Layer w11: v1(732.65,840) R2.1
NetR3_1: R3.1 SW1.7 | length 642.6
  Top Layer w11: v1(565,1285) 771.93,1285 809.4,1247.53 809.4,964.44 795,950.04 SW1.7
  Bottom Layer w11: v1(565,1285) 620,1285 R3.1
NetR3_2: R3.2 U1.62 | length 139.3
  Bottom Layer w11: R3.2 712.99,1283.19 773.75,1283.19 783.66,1273.27 U1.62
NetR4_1: R4.1 SW1.6 | length 692
  Top Layer w11: v1(565,1355) 728.8,1355 828.4,1255.4 828.4,966.6 SW1.6@835.5,959.5 ; SW1.6@835.54,959.5 845,950.04 SW1.6
  Bottom Layer w11: v1(565,1355) R4.1
NetR4_2: R4.2 U1.63 | length 157.5
  Bottom Layer w11: R4.2 736.78,1355 798.55,1293.23 836.34,1293.23 U1.63
NetR5_1: R5.1 SW1.5 | length 764.1
  Top Layer w11: v1(565,1430) 685,1430 847.4,1267.6 847.4,997.64 895,950.04 SW1.5
  Bottom Layer w11: v1(565,1430) 570,1435 R5.1
NetR5_2: R5.2 U1.64 | length 191.6
  Bottom Layer w11: R5.2 725,1435 831.4,1328.6 831.4,1313.04 836.22,1313.04 U1.64
Oscillator: U1.45 Y1.3 | length 289.4
  Bottom Layer w11: Y1.3 860.24,755.55 976.42,871.73 U1.45
P2_2: P2_2.1 U1.4 | length 437.4
  Bottom Layer w11: P2_2.1 727.8,1700 976.42,1451.38 U1.4
P2_3: P2_3.1 U1.5 | length 387.9
  Bottom Layer w11: P2_3.1 996.1,1503.9 U1.5
P2_4: P2_4.1 U1.6 | length 354.2
  Bottom Layer w11: P2_4.1 1015.51,1584.49 U1.6@1015.51,1393.66
P2_5: P2_5.1 U1.7 | length 321.3
  Bottom Layer w11: P2_5.1 1035.47,1664.53 U1.7
P2_6: P2_6.1 U1.8 | length 325.2
  Bottom Layer w11: U1.8 1055.16,1655.16 P2_6.1
P2_7: "GND P2_3 Vcc.2" U1.9 | length 1652.5
  Bottom Layer w11: U1.9 1074.84,1609.84 1156.5,1691.5 1156.5,2118.02 1188.48,2150 1211.52,2150 1250,2188.48 1250,2211.52 1288.48,2250 1311.52,2250 1346.75,2285.23 1346.75,2308.27 1383.61,2345.12 1406.64,2345.12 1443.5,2381.98 1443.5,2826.5 1425,2845
P3_5: P3_5.1 U1.25 | length 1200
  Top Layer w11: P3_5.1 1465,2135 1465,1229.21 v1(1422.9,1187.1)
  Bottom Layer w11: U1.25 1390.95,1155.16 v1(1422.9,1187.1)
P3_7: P3_7.1 U1.23 | length 1014.7
  Top Layer w11: v1(1380,1240) 1381.93,1240 1445,1303.07 1445,2055 P3_7.1
  Bottom Layer w11: U1.23@1293.66,1194.81 1339.81,1194.81 1380,1235 v1(1380,1240)
P5_1: P5_1.1 U1.52 | length 888
  Bottom Layer w11: U1.52 836.9,1076.7 874.69,1076.7 984.81,1186.81 1070.74,1186.81 1300,1416.08 P5_1.1
P6_1: P6_1.1 U1.13 | length 325.8
  Bottom Layer w11: U1.13 1153.86,1393.66 1153.86,1433.86 1200,1480 P6_1.1
P6_5_P12_1: P6_5.1 U1.16 | length 1550.3
  Top Layer w11: v1(1030,1220) 1030,1225.63 1053.19,1248.81 1053.19,1914.7 1086.38,1947.9 1109.42,1947.9 1152.3,1990.78 1152.3,2013.82 1186.58,2048.1 1209.62,2048.1 1252.71,2091.19 1252.71,2114.22 1287.39,2148.91 1310.43,2148.91 1354.32,2192.8 1354.32,2254.32 P6_5.1
  Bottom Layer w11: v1(1030,1220) 1077.05,1220 1212.36,1355.31 1212.36,1393.1 U1.16
P7_1: P7_1.1 U1.38 | length 1265.4
  Top Layer w11: v1(1055,1035) 1055,1195 1145,1285 1145,1706.52 1186.58,1748.1 1209.62,1748.1 1252.71,1791.19 1252.71,1814.22 1287.39,1848.91 1310.43,1848.91 1354.32,1892.8 1354.32,1954.32 P7_1.1
  Bottom Layer w11: v1(1055,1035) 1068,1035 1114.21,988.78 U1.38
Pot: Pot.3 U1.2 | length 1290
  Bottom Layer w11: Pot.3 556.5,2339.56 556.5,1737.02 556.5,1681.98 603.48,1635 736.87,1635 936.77,1435.1 936.77,1393.66 U1.2
Pot2: Pot.4 U1.3 | length 1386.9
  Bottom Layer w11: Pot.4 480.12,2479.72 542.54,2417.29 542.54,2395.94 581.98,2356.5 605.02,2356.5 643.5,2318.02 643.5,1694.98 683.48,1655 743.74,1655 956.45,1442.29 956.45,1393.66 U1.3
Reset: PRG.10 R1.1 Reset.1 RESET.2a RESET.2b | length 1343.4
  Top Layer w11: RESET.2a RESET.2b 508.58,310.94 525,327.35 Reset.1
  Bottom Layer w11: R1.1 623.11,405.2 515.87,297.95 RESET.2b 536.55,270 1260,270 PRG.10
SC1: SPI.6 U1.30 | length 468.7
  Bottom Layer w11: U1.30@1293.66,1056.45 1338.64,1056.45 1470,925.09 1470,753.39 SPI.6
SC2: SPI.7 U1.31 | length 562.9
  Bottom Layer w11: U1.31@1293.66,1036.77 1331.45,1036.77 1450,918.22 1450,655.28 SPI.7
SC3: SPI.8 U1.32 | length 656.9
  Bottom Layer w11: U1.32@1293.78,1016.96 1324.39,1016.96 1430,911.35 1430,557.17 SPI.8
SCK: SPI.5 U1.29 | length 374.8
  Bottom Layer w11: U1.29 1345.54,1076.42 1516.81,905.15 SPI.5
SCL: I2C.3 U1.43 | length 534.8
  Bottom Layer w11: I2C.3 960,611.06 960,801.57 968.82,810.39 970.39,810.39 1015.79,855.79 U1.43
SDA: I2C.4 U1.44 | length 574.2
  Bottom Layer w11: I2C.4 710.94,579.39 995.82,864.26 U1.44@995.82,936.34
ServoPWM1: PWM_1.3 U1.12 | length 1208.1
  Bottom Layer w11: PWM_1.3 515,1926.06 515,1669.74 589.74,1595 720,1595 897.96,1417.04 897.96,1347.04 970,1275 1067.68,1275 1133.9,1341.22 U1.12@1133.9,1392.82
ServoPWM2: PWM_2.3 U1.51 | length 359.3
  Top Layer w11: PWM_2.3 480.59,1050.47 771.14,1050.47 v1(771.22,1050.55)
  Bottom Layer w11: v1(771.22,1050.55) 777.12,1056.45 836.34,1056.45 U1.51
ServoPWM3: PWM_3.3 U1.24 | length 291.8
  Bottom Layer w11: U1.24 1361.77,1174.84 1516.81,1329.88 PWM_3.3
ServoPWM4: PWM_4.3 U1.19 | length 710.3
  Bottom Layer w11: U1.19 1339.47,1273.27 1465,1398.8 1465,1812.24 PWM_4.3
ServoPWM5: PWM_5.3 U1.15 | length 1156.8
  Bottom Layer w11: U1.15 1193.23,1393.66 1193.23,1433.23 1255,1495 1255,2116.52 1291.66,2153.18 1314.7,2153.18 1349.86,2188.34 1349.86,2211.37 1394.69,2256.21 1417.73,2256.21 1455.92,2294.4 1455.92,2328.17 PWM_5.3
UARTRXD: U1.58 UART.3 UARTRX.1 | length 993.2
  Top Layer w11: UART.3 435.02,1536.98 435.02,1635.02 UARTRX.1
  Bottom Layer w11: UART.3 480,1491.77 480,1290 575.47,1194.53 U1.58
UARTTXD: U1.59 UART.4 UARTTX.1 | length 847
  Top Layer w11: UART.4 560.74,1690.62 590.62,1690.62 UARTTX.1
  Bottom Layer w11: UART.4 530,1560.12 530,1270 585.79,1214.21 U1.59@836.06,1214.21
VBUS_P13_2: P13_2.1 U1.36 | length 1102.6
  Top Layer w11: v1(1125,1125) 1125,1235 1245,1355 1245,1706.52 1287.39,1748.91 1310.43,1748.91 1354.32,1792.8 1354.32,1854.32 P13_2.1
  Bottom Layer w11: v1(1125,1125) 1153.58,1096.42 U1.36
VCC: "GND P2_3 Vcc.3" C1.2 C2.1 C3.2 C4.1 C6.2 C7.2 C8.1 D1.1 Encoder.2 F1.2 I2C.2 PRG.1 PWM_1.2 PWM_2.2 PWM_3.2 PWM_4.2 PWM_5.2 R6.2 R8.1 R9.1 R10.1 R11.1 SPI.2 U1.11 U1.26 U1.50 U1.56 U2.3 U2.5 UART.2 Vcc1.1 Vcc2.1 Vcc3.1 Vcc.1 Y1.1 Y1.4 | length 2862.1
  Top Layer w11: Vcc.1@1000,2945 1175,2945 1275,2845
  Bottom Layer w11: C3.2@610,1070 610,1150 615.16,1155.16 v1(720,1155.16) U1.56 ; C3.2@615,1070 C3.2@618.5,1066.5 ; U1.50 836.9,1037.33 902.33,1037.33 v1(905,1040) ; Y1.4 Y1.1 1000,558.7 935.43,494.13 935.43,473.64 v1(930,468.21) 930,402.99 950.09,382.9 960.32,382.9 987.94,355.28 987.94,350.17 1003.11,335 R9.1 R10.1 ; v1(1020,1310) 1075.81,1310 1113.93,1348.12 1113.93,1393.1 U1.11 1114.21,1472.17 1152.05,1510 C1.2@1155,1510 ; R6.2@1030,135.2 R6.2@1036.89,135.2 ; R6.2@1051.89,135.2 1076.69,160 PRG.1 C7.2@1120,75 ; R8.1 1255.17,319.83 1287.04,319.83 1401.44,205.43 1439.57,205.43 v1(1445,200) ; C8.1@1255,840 1265,830 U2.3 1265,715 1300,680 v1(1300,670) 1300,669.37 1315,654.37 U2.5 ; U1.26 1524.53,1135.47 1525,1135 1556.04,1135 PWM_3.2@1634.92,1213.88 ; R11.1 1367.4,340 v1(1445,340)
  Bottom Layer w15: Vcc3.1@1290,2500 Vcc3.1
  Bottom Layer w60: F1.2@1045,2625 D1.1
VREF: Pot.2 U1.1 | length 1448.3
  Bottom Layer w11: Pot.2 435.02,2461.04 435.02,2397.27 535,2297.29 535,1676.61 596.61,1615 730,1615 916.96,1428.04 U1.1@916.96,1393.78
pads on no net: "CAN Termination.3" "Standard Header.5" "Standard Header.7" "Standard Header.9" "Standard Header.11" "Standard Header.13" "Standard Header.15" DH1.1 DH2.1 DH3.1 DH4.1 DH5.1 DH6.1 DH7.1 DH8.1 DH9.1 DH10.1 DH11.1 DH12.1 DH13.1 DH14.1 DH15.1 DH16.1 DH17.1 DH18.1 DH19.1 DH20.1 DH21.1 DH22.1 DH23.1 DH24.1 DH25.1 DH26.1 DH27.1 DH28.1 DH29.1 DH30.1 DH31.1 DH32.1 DH33.1 DH34.1 DH35.1 DH36.1 DH37.1 DH38.1 DH39.1 DH40.1 DH41.1 DH42.1 DH43.1 DH44.1 DH45.1 DH46.1 DH47.1 DH48.1 DH49.1 DH50.1 DH51.1 DH52.1 DH53.1 DH54.1 DH55.1 Encoder.6 Encoder.7 I2C.None Pot.None PRG.6 PRG.7 PRG.8 PWM_1.None PWM_2.None PWM_3.None PWM_4.None PWM_5.None SPI.9 SPI.10 U1.33 UART.None
copper on no net:
  other v2: 150,150 1850,150 150,2850 1850,2850

## Polygon pours and split planes (outlines as drawn)
VCC on Vcc "Vcc" (solid, pour order 1): 25,2850 25,160 ccw(c160,160) 160,25 1845,25 ccw(c1845,155) 1975,155 1975,2845 ccw(c1845,2845) 1845,2975 150,2975 ccw(c150,2850)
no net on Vcc "NONET_L02_P000" (solid, pour order 0): 30,2975
GND on GND "GND" (solid, pour order 2): 25,2845 25,155 ccw(c155,155) 155,25 1845,25 ccw(c1845,155) 1975,155 1975,2845 ccw(c1845,2845) 1845,2975 155,2975 ccw(c155,2845)
VCC on Bottom Layer "VCC" (solid, pour order 3): 1050,2695 1050,2450 1350,2450 1350,2550 1215,2550 1215,2695

## Silkscreen, mask and mechanical layers (free items; w line width, h text height)
Top Overlay:
  drawing of 124 lines, arcs and shapes, not listed
  text "CAN GPIO" at 975,1410 h60
  text "Rev 1.0" at 1091,1356 h30
  text "Robert Warren" at 630,1255 h60
  text "Board Voltage:" at 1016,986 h30

## Text inside footprints (layer, text, board x,y; h text height)
U1: Bottom Overlay "33" at 1250,905 h19.68 r90; Bottom Overlay "16" at 1223.87,1462.65 h19.68 r90; Bottom Overlay "17" at 1359,1334 h19.68 r90; Bottom Overlay "32" at 1357,1027 h19.68 r90; Bottom Overlay "48" at 927,892 h19.68 r90; Bottom Overlay "49" at 793,1029 h19.68 r90; Bottom Overlay "64" at 793,1330 h19.68 r90